# Altium PCB Slave_Sensor.PcbDoc
Units mil, origin at the board's own origin, x right, y up, seen from the top; angles counter-clockwise.
Board outline 6000 x 4000 mil, 2 copper layers (Top Layer, Bottom Layer); 29 components, 24 nets, 102 pads, 8 vias.
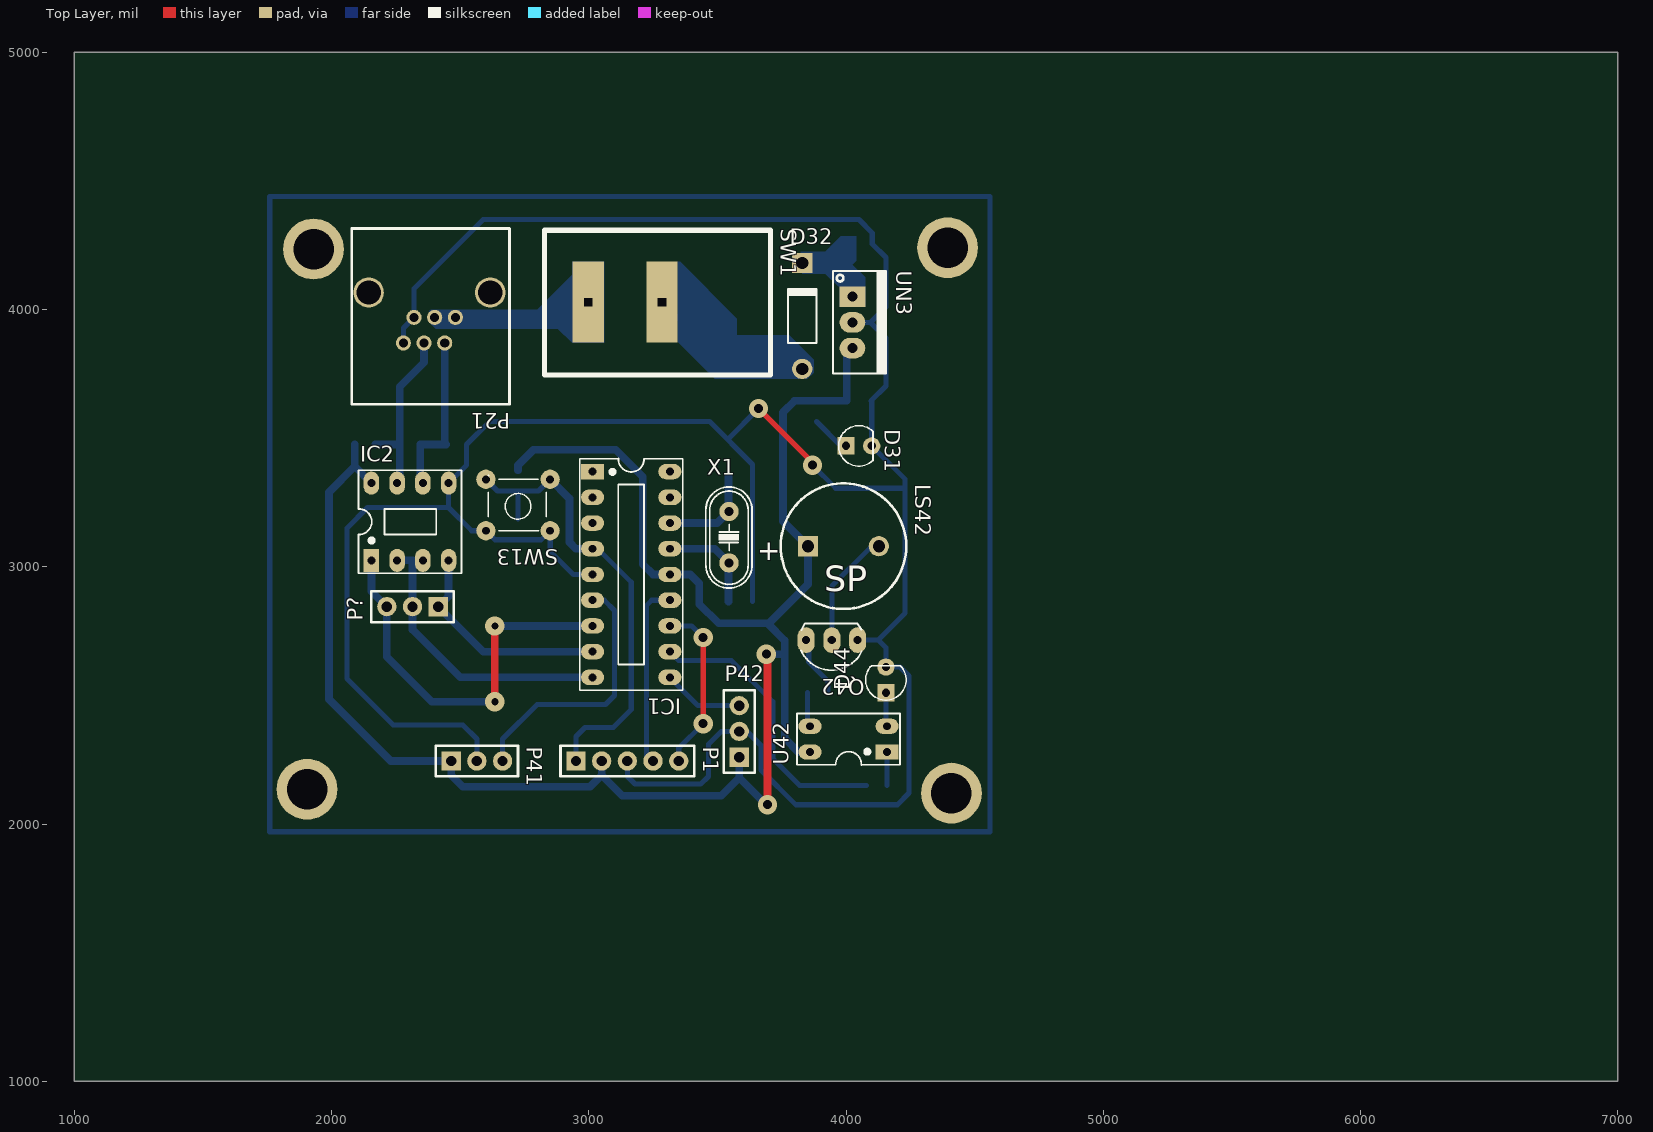
[diagram p0: Top Layer view]
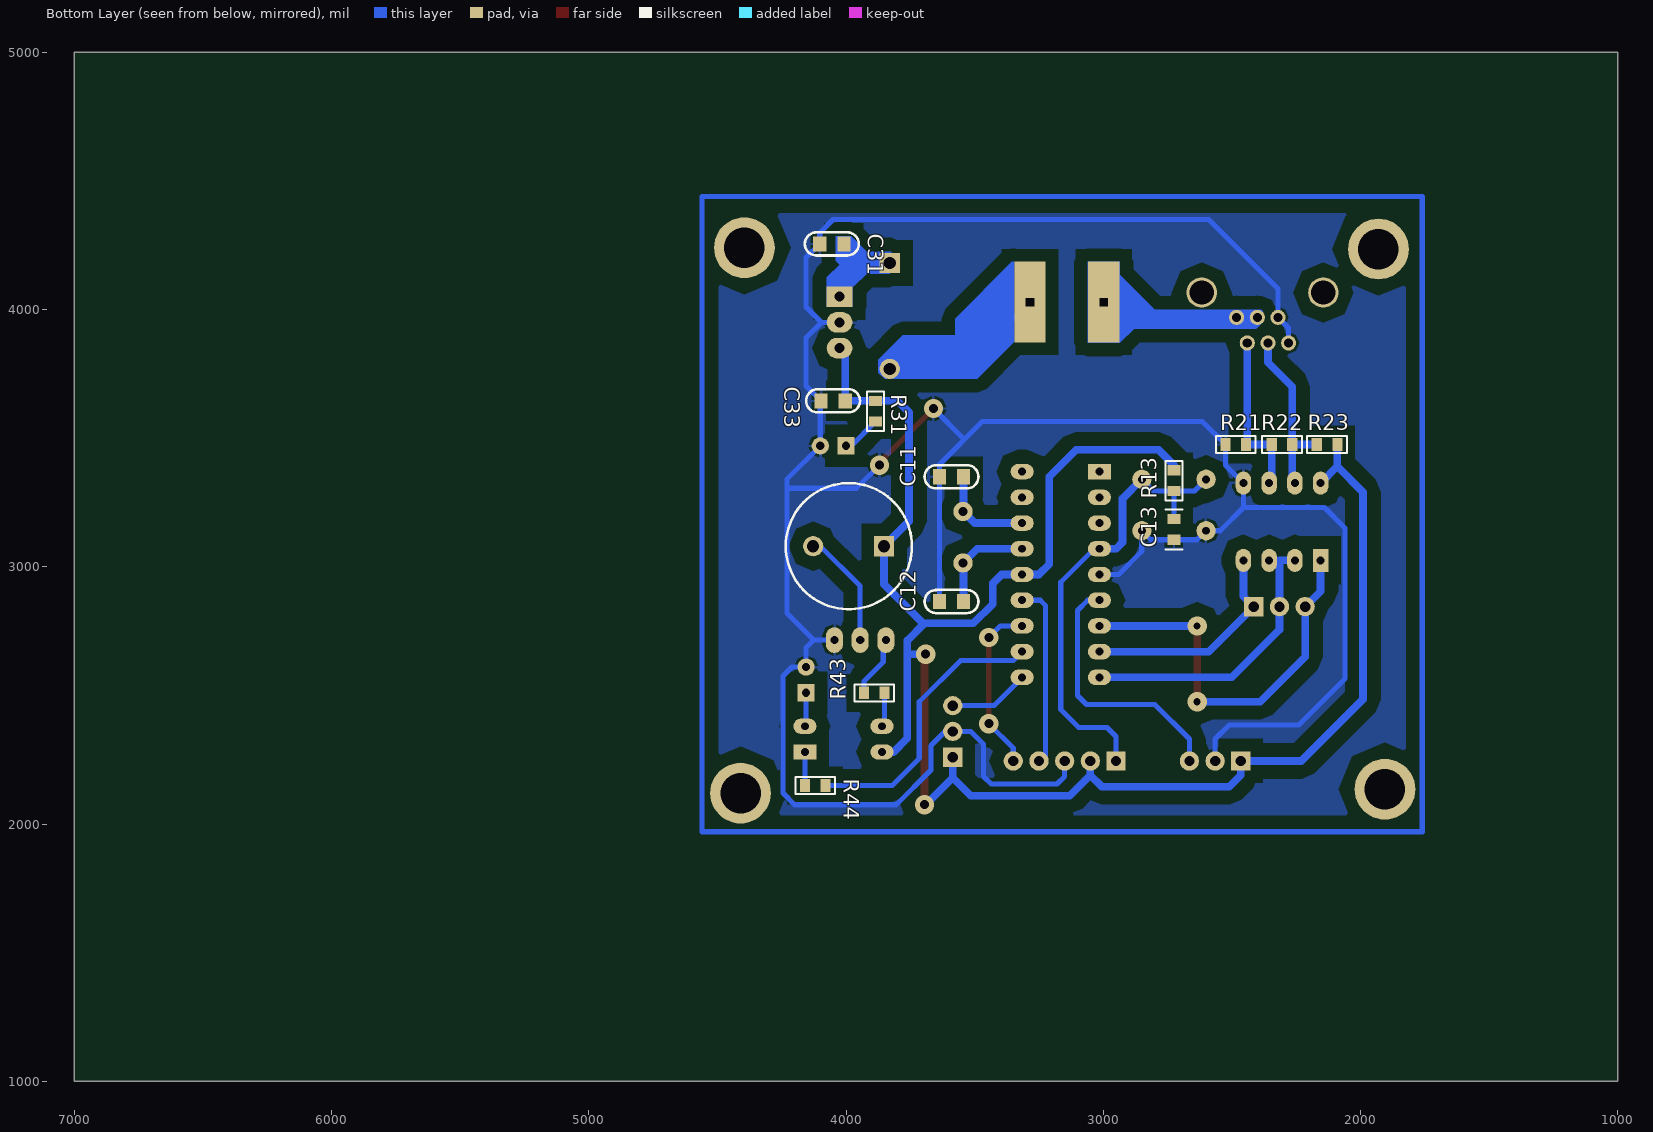
[diagram p1: Bottom Layer view, seen from below]
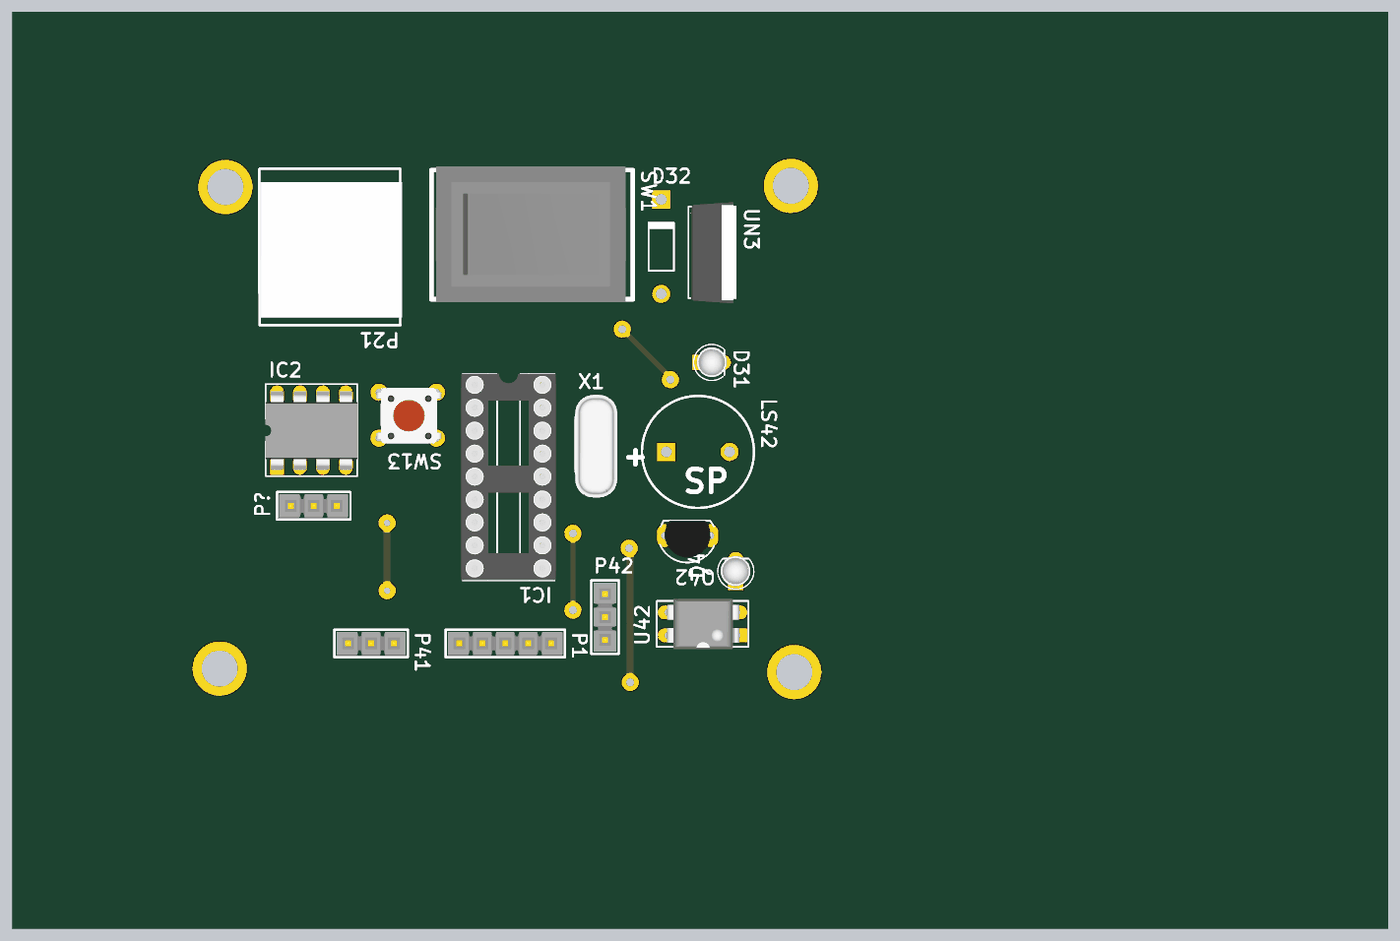
[diagram p2: 3D render of the assembled board from above, using the file's embedded part models]
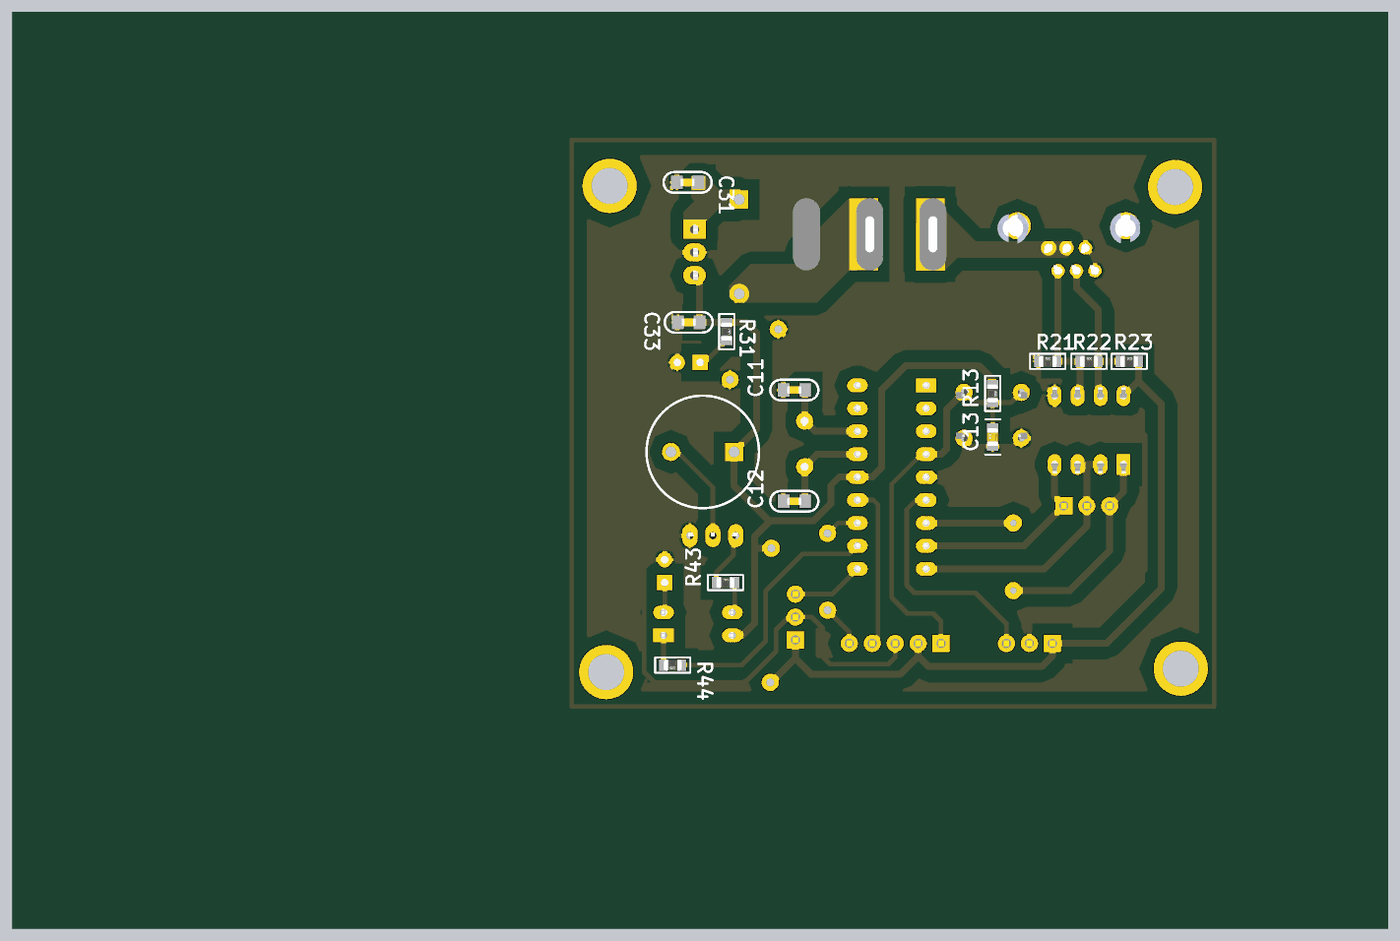
[diagram p3: 3D render of the assembled board from below, using the file's embedded part models]

## Layer stack, top to bottom
Top Solder: solder mask 0.4, Solder Resist, Dk 3.5
Top Layer: signal copper 1.4
Dielectric 1: dielectric 12.6, FR-4, Dk 4.8
Bottom Layer: signal copper 1.4
Bottom Solder: solder mask 0.4, Solder Resist, Dk 3.5

## Board outline
1000,1000 7000,1000 7000,5000 1000,5000

## Design rules (kind name [scope] priority, off if disabled: settings)
Clearance [All] p1: gap=50
PolygonConnect [All] p1: connectstyle=Relief reliefconductorwidth=10 reliefentries=4 polygonreliefangle="90 Angle" airgapwidth=10
RoutingVias [All] p1: holewidth=28 width=50 viastyle="Through Hole" minholewidth=28 minwidth=50 maxholewidth=28 maxwidth=50
SolderMaskExpansion [All] p1: expansion=4
Width [All] p1: maxlimit=50 minlimit=15 preferedwidth=20
30 further rules are at their usual default settings.

## Components (designator, comment, footprint, x,y, rotation, side; value= is the part's Value field where it differs from the comment)
C11 "Cap Non-pol" C-NP-0805 3590,3350 r0 bottom
C12 "Cap Non-pol" C-NP-0805 3590,2865 r0 bottom
C13 "Capacitor Ceramic" CAP_SMD_0805 2725,3145 r90 bottom
C31 "Cap Non-pol" C-NP-0805 4055,4255 r180 bottom
C33 "Cap Non-pol" C-NP-0805 4050,3645 r180 bottom
D31 "LED" "LED-0 3mm RED" 4050,3470 r90 top
D32 "Diode 1N4007" DO-41 3830,3975 r90 top
D44 "LED" "LED-0 3mm YELLOW" 4155,2560 r180 top
IC1 "PIC16F628A" DIP18/W0.3 3015,3370 r270 top
IC2 "MAX485" DIP8/W0.3 2155,3025 r0 top
LS42 "Speaker_1" SPEAKER 3990,3080 r0 top
P1 "Header 5" "Header 5" 2950,2245 r0 top
P21 "Header 8" RJ11 2440,3870 r180 top
P41 "Header 3" "Header 3" 2465,2245 r0 top
P42 "Header 3" "Header 3" 3585,2260 r90 top
P? "Header 3" "Header 3" 2415,2845 r180 top
Q42 "C1815" QTO-92 3945,2715 r180 top
R13 "RES_SMD_0805" "DIEN TRO 0805" 2725,3335 r90 bottom
R21 "RES_SMD_0805" "DIEN TRO 0805" 2485,3475 r0 bottom
R22 "RES_SMD_0805" "DIEN TRO 0805" 2305,3475 r0 bottom
R23 "RES_SMD_0805" "DIEN TRO 0805" 2130,3475 r0 bottom
R31 "RES_SMD_0805" "DIEN TRO 0805" 3885,3605 r90 bottom
R43 "RES_SMD_0805" "DIEN TRO 0805" 3890,2510 r0 bottom
R44 "RES_SMD_0805" "DIEN TRO 0805" 4120,2150 r180 bottom
SW1 "SW_BapBenh" SW_Bapbenh 3025,4025 r270 top
SW13 "SW7" SW4 2850,3140 r180 top
U42 "TLP521-1" DIP4/W0.3 4160,2280 r90 top
UN3 "L78M05CP" QTO-220 4025,4050 r270 top
X1 "20Mhz" XT2 3545,3115 r90 top

## Footprints (in the part's own frame and the unit in brackets; to place one, negate y for a bottom-side part, rotate by r counter-clockwise, add the part's x,y. Pads: shape width x height; smd on the part's side, far side on the other; paste and mask are expansions set on the pad)
C-NP-0805 [mm] "Chip Capacitor; Non-polarized; Body 2.0 x 1.3 mm (LxW typ) [2012]"
  rect 1.3x1.5 smd: 1(-1.194,0) 2(1.194,0)
  silkscreen extent -2.67,-1.14 2.66,1.14, body extent -0.8,-0.43 0.8,0.43, height 0.79
CAP_SMD_0805 [mil] "Chip Resistor; Body 2.0 x 1.3 mm (LxW typ)"
  rect 39.37x50 smd: 1(-40,0) 2(40,0)
  silkscreen extent -77,-33 77,33, body extent -39,-25 39,25, height 31
"DIEN TRO 0805" [mil] "Chip Resistor; Body 2.0 x 1.3 mm (LxW typ)"
  rect 39.37x50 smd: 1(-40,0) 2(40,0)
  silkscreen extent -77,-33 77,33, body extent -39,-25 39,25, height 31
DIP4/W0.3 [mil] "4 PIN, W 300mil, Pin to pin 100mil"
  rect 60x90 hole 31: 1(0,0)
  oval 60x90 hole 31: 2(100,0) 3(100,300) 4(0,300)
  silkscreen extent -50,-50 150,350, body extent -59,-10 159,305, height 170
DIP8/W0.3 [mil] "8 PIN, W 300mil, Pin to pin 100mil"
  rect 60x90 hole 31: 1(0,0)
  oval 60x90 hole 31: 2(100,0) 3(200,0) 4(300,0) 5(300,300) 6(200,300) 7(100,300) 8(0,300)
  silkscreen extent -50,-50 350,350, body extent -50,-40 350,336, height 201
DIP18/W0.3 [mil] "18 PIN, W 300mil, Pin to pin 100mil"
  rect 60x90 hole 31: 1(0,0)
  oval 60x90 hole 31: 2(100,0) 3(200,0) 4(300,0) 5(400,0) 6(500,0) 7(600,0) 8(700,0) 9(800,0) 10(800,300) 11(700,300) 12(600,300) 13(500,300) 14(400,300) 15(300,300) 16(200,300) 17(100,300) 18(0,300)
  silkscreen extent -50,-50 850,350, body extent -51,-57 849,356, height 119
DO-41 [mm] "Diode, Axial; Body 5.2 x 2.7 mm (LxDia. max), Lead Dia. 0.86 mm (max)"
  round 2 hole 1.2: 1(-5.23,0)
  rect 2x2 hole 1.2: 2(5.23,0)
  silkscreen extent -2.65,-1.4 2.75,1.4
"Header 3" [mil] "Connector; Header; 3 Position; Solder Pad 35mil"
  rect 75x75 hole 40: 1(0,0)
  round 75 hole 40: 2(100,0) 3(200,0)
  silkscreen extent -60,-60 260,60, body extent -50,-50 250,50, height 83
"Header 5" [mil] "Connector; Header; 5 Position; Solder Pad 35mil"
  rect 75x75 hole 40: 1(0,0)
  round 75 hole 40: 2(100,0) 3(200,0) 4(300,0) 5(400,0)
  silkscreen extent -60,-60 460,60, body extent -50,-50 450,50, height 83
"LED-0 3mm RED" [mil] "Typical LED; RED; 2 Leads; Solder Pad 35mil"
  rect 67x67 hole 32: 1(0,50)
  round 67 hole 32: 2(0,-50)
  silkscreen extent -79,-56 79,79, body extent -64,-66 66,64, height 207
"LED-0 3mm YELLOW" [mil] "Typical LED; YELLOW; RED; 2 Leads; Solder Pad 35mil"
  rect 67x67 hole 32: 1(0,50)
  round 67 hole 32: 2(0,-50)
  silkscreen extent -79,-56 79,79, body extent -64,-66 66,64, height 207
QTO-92 [mil] "TO-92"
  oval 66x100 hole 32: 1(-100,0) 2(0,0) 3(100,0)
  silkscreen extent -117,-65 120,118, body extent -109,-66 109,95, height 245
QTO-220 [mil] "TO-220 - 1-2-3"
  rect 80x100 hole 39: 1(0,0)
  oval 80x100 hole 39: 2(100,0) 3(200,0)
  silkscreen extent -100,-76 300,130, body extent -119,-64 322,121, height 755
RJ11 [mm] "DIP 20, 20 PIN, W 300mil, Pin to pin 100mil"
  round 1.5 hole 0.9: 1(0,0) 2(2.04,0) 3(4.08,0) 4(-1.05,-2.53) 5(0.99,-2.53) 6(3.03,-2.53)
  round 3 hole 2.4: 7(-4.5,-4.98) 8(7.51,-4.98)
  silkscreen extent -6.43,-11.3 9.2,6.03, body extent -6.71,-9.8 9.11,5.19, height 12.87
SPEAKER [mm] "Speaker footprint"
  rect 2x2 hole 1.2: 1(-3.5,0)
  round 2 hole 1.2: 2(3.5,0)
  silkscreen extent -6.2,-6.2 6.2,6.2, body extent -6.2,-6.2 6.2,6.2, height 10.02
SW4 [mil] "SW button 4pin, 250 x250 mil"
  round 75 hole 31: 1(0,0) 2(250,-200) 3(250,0) 4(0,-200)
  silkscreen extent 15,-215 240,0, body extent -36,-220 276,24, height 276
SW_Bapbenh [mm] "Typical LED; GREEN; RED; 2 Leads; Solder Pad 35mil"
  rect 8x3.1 hole 0.8 square: 1(-0.1,-0.7) 2(-0.1,6.6)
  silkscreen extent -7.2,-5 7.1,17.3, body extent -7.6,-4.55 7.4,16.55, height 16.72
XT2 [mil] "Footpin for Crystal 2 pin"
  round 75 hole 34: 1(-100,0) 2(100,0)
  silkscreen extent -198,-90 195,90, body extent -233,-93 213,90, height 138

## Part data
C11 C12 C31 C33: "Non-polarized Capacitor"
C13: library part CapSMD, "Capacitor"
D31 D44: "Typical LED"
D32: "1 Amp General Purpose Rectifier"
IC2: "RS232 - RS485 (Same sn75176)"
LS42: "Loudspeaker"
P1: "Header, 5-Pin"
P21: "Header, 8-Pin"
P41 P42 P?: "Header, 3-Pin"
Q42: "NPN 600mW, ECB"
R13 R21 R22 R23 R31 R43 R44: "RES_0805"
SW13: library part SW4, "Switch button 4 pin"
U42: "Single Opto"
UN3: "Positive Voltage Regulator"
X1: library part XT2, "Crystal For all Crystal 2pin."

## Free pads (board coordinates)
  round 236.22 hole 157.48: 2(1905,2135) 2(1930,4235) 2(4395,4240) 2(4410,2120)

## Via types
v1: diameter 75, hole 35, Top Layer to Bottom Layer, 6 vias
v2: diameter 75, hole 28, Top Layer to Bottom Layer, 2 vias

## Nets (pads, with @x,y where several pads share a name; then routed paths per layer and width w, separated by ;. In a path a pad name is that pad's centre, name@x,y a point inside that pad or via, vN(x,y) a via of type N, cw(c..) or ccw(c..) an arc to the next point about the centre after c; other vN are vias at no path point)
12V: P21.4 P21.5 SW1.1 | length 621
  Bottom Layer w20: P21.5 P21.4 2938.11,3969.61 SW1.1
A: IC2.6 P21.1 R21.1 R22.2 | length 651.2
  Bottom Layer w30: IC2.6 2345,3335 R22.2 R21.1 2440,3480 P21.1
B: IC2.7 P21.2 R22.1 R23.2 | length 683.4
  Bottom Layer w20: IC2.7 IC2.7@2265,3335
  Bottom Layer w30: R23.2 R22.1 ; IC2.7@2265,3335 R22.1 ; P21.2 2359.68,3794.68 2265,3700 R22.1
DHT11: IC1.6 P41.3 | length 1022
  Bottom Layer w20: P41.3 2665,2330 2800,2465 3065,2465 3100,2500 3100,2830 3060,2870 IC1.6
GAS: IC1.10 P42.3 | length 315.6
  Bottom Layer w20: IC1.10 3425,2460 P42.3
GND: C11.2 C12.2 C13.1 C31.1 C33.1 D31.2 D44.2 IC1.5 IC2.5 P1.3 P21.3 P21.6 P41.2 P42.2 Q42.1 R21.2 SW13.1 SW13.3 UN3.2 | length 11627.7
  Top Layer w20: v1(3660,3615) 3870,3405 v1(3870,3395)
  Bottom Layer w20: P21.3 2279.37,3928.27 P21.6 2320.71,4080.71 2590,4350 4050,4350 4102,4298 C31.1 4155,4202 4155,4010 4095,3950 ; P41.2 2565,2330 2510,2385 2240,2385 2060,2565 2060,3150 2140,3230 2455,3230 ; IC1.5 2940,2970 2850,3060 SW13.1 2815,3105 C13.1 2635,3105 SW13.3 2545,3140 2455,3230 ; P1.3 3150,2185 3180,2155 3435,2155 3465,2185 3465,2310 3515,2360 P42.2 3615,2360 3670,2305 3670,2210 3805,2075 4200,2075 4245,2120 4245,2575 4210,2610 D44.2 4155,2685 4125,2715 ; 3540,3495 v1(3660,3615) ; C12.2 C11.2 3637,3398 3470,3565 2615,3565 R21.2 2525,3395 IC2.5 2455,3230 ; v1(3870,3395) 3960,3305 4230,3305 ; Q42.1@4025,2715 4125,2715 ; UN3.2 4095,3950 ; 4095,3950 4155,3890 4155,3703 C33.1 4100,3642 D31.2 4230,3340 4230,3305 ; 4125,2715 4230,2820 4230,3305
MCLR: C13.2 IC1.4 P1.1 R13.1 SW13.2 SW13.4 | length 1826
  Bottom Layer w20: SW13.2 2645,3295 R13.1 ; C13.2 R13.1 ; SW13.4 2805,3295 R13.1 ; P1.1 2950,2340 2985,2375 3095,2375 3165,2445 3165,2940 3035,3070 IC1.4
  Bottom Layer w30: SW13.4 2925,3265 2925,3095 2950,3070 IC1.4
NetC31_2: C31.2 D32.2 UN3.1 | length 383.4
  Bottom Layer w20: D32.2 3969.09,4180.91 ; C31.2 4008,4219.81 3969.09,4180.91 ; UN3.1 4025,4125 3969.09,4180.91
NetD31_1: D31.1 R31.1 | length 154.4
  Bottom Layer w20: R31.1 3980,3470 D31.1
NetD32_1: D32.1 SW1.2 | length 652.8
  Bottom Layer w20: SW1.2 3544.68,3769.09 D32.1
NetD44_1: D44.1 U42.2 | length 132.1
  Bottom Layer w20: D44.1 4155,2385 U42.2
NetLS42_2: LS42.2 Q42.2 | length 465.3
  Bottom Layer w20: Q42.2@3925,2715 3945,2735 3945,2925 4100,3080 LS42.2
NetQ42_3: Q42.3 R43.2 | length 257.3
  Bottom Layer w20: Q42.3@3825,2715 3840,2715 3855,2700 3855,2630 3930,2555 R43.2
NetR43_1: R43.1 U42.3 | length 134.1
  Bottom Layer w20: R43.1 3850,2390 U42.3
NetR44_1: R44.1 U42.1 | length 130
  Bottom Layer w20: R44.1 U42.1
PGC: IC1.12 P1.5 | length 698
  Top Layer w20: v1(3445,2390) v1(3445,2725)
  Bottom Layer w20: IC1.12@3285,2770 IC1.12 3400,2770 v1(3445,2725) ; P1.5 3350,2295 v1(3445,2390)
PGD: IC1.13 P1.4 | length 722.7
  Bottom Layer w20: P1.4 3250,2240.46 3225,2265.46 3225,2850 3245,2870 IC1.13
RXD: IC1.7 IC2.1 P?.3 | length 1567.3
  Top Layer w30: v2(2635,2475) v2(2635,2770)
  Bottom Layer w30: IC2.1 2155,2905 P?.3 2215,2650 2390,2475 v2(2635,2475) ; v2(2635,2770) IC1.7
SEC: IC1.9 IC2.2 IC2.3 P?.2 | length 1106.6
  Bottom Layer w30: IC2.2 2315,3025 P?.2 2315,2755 2500,2570 IC1.9
SPEAKER: IC1.11 R44.2 | length 1109.3
  Bottom Layer w20: IC1.11 3350,2635 3555,2635 3715,2475 3715,2255 3820,2150 R44.2
TXD: IC1.8 IC2.4 P?.1 | length 869.1
  Bottom Layer w30: IC2.4 2455,2885 P?.1 2590,2670 IC1.8
VCC: C33.2 IC1.14 IC2.8 LS42.1 P1.2 P41.1 P42.1 R13.2 R23.1 R31.2 U42.4 UN3.3 | length 7463.5
  Top Layer w30: v1(3690,2660) 3695,2655 v1(3695,2075)
  Bottom Layer w30: R23.1 2090,3390 ; IC2.8 2090,3390 ; R13.2 2725,3395 2785,3455 3105,3455 3210,3350 3210,3010 3250,2970 IC1.14 3395,2970 3430,2935 3430,2855 3505,2780 3697.5,2780 ; P1.2 3050,2190 ; P42.1 3585,2180 ; v1(3690,2660) 3757,2660 3762,2655 ; v1(3695,2075) 3690,2075 3585,2180 ; U42.4 3815,2280 3762,2333 3762,2655 ; UN3.3 4003,3828 C33.2 R31.2 3800,3645 3755,3600 3755,3177.2 LS42.1 3852.2,2932.2 3697.5,2777.5 3762,2713 3762,2655 ; 2090,3390 1990,3290 1990,2485 2230,2245 P41.1 2465,2190 2510,2145 3005,2145 3050,2190 ; 3050,2190 3130,2110 3515,2110 3585,2180
XT1: C11.1 IC1.16 X1.2 | length 384.5
  Bottom Layer w30: IC1.16 3500,3170 X1.2 3543,3217 C11.1
XT2: C12.1 IC1.15 X1.1 | length 403.6
  Bottom Layer w30: IC1.15 3490,3070 X1.1 3543,3013 C12.1
pads on no net: IC1.1 IC1.2 IC1.3 IC1.17 IC1.18 P21.7 P21.8
copper on no net: | length 10540
  Bottom Layer w20: 1760,1970 4560,1970 4560,4440 1760,4440 1760,4400 1760,1970

## Polygon pours and split planes (outlines as drawn)
GND on Bottom Layer "G2" (solid, remove dead copper, pour order 2): 1880,4415 1790,4325 1790,2000 4535,2000 4535,4415

## Other copper
Bottom Layer:
  region net NetC31_2: 3825,4225 3920,4225 3980,4285 4040,4285 4040,4190 4025,4175 4075,4125 4075,4010 3975,4010 3975,4090 3970,4090 3920,4140 3830,4140
  region net NetD32_1: 3345,3875 3490,3730 3850,3730 3875,3755 3875,3805 3780,3900 3575,3900 3575,3965 3355,4185 3345,4185
  region net 12V: 2385,3945 2405,3925 2880,3925 2935,3870 3060,3870 3060,4185 2935,4185 2935,4135 2800,4000 2385,4000 2380,3995

## Text inside footprints (layer, text, board x,y; h text height)
LS42: Top Overlay "SP" at 3915,2905 h100; Top Overlay "+" at 3655,3025 h80